# Altium PCB PCB1.PcbDoc
Units mm, origin at the board's own origin, x right, y up, seen from the top; angles counter-clockwise.
Board outline 70.61 x 37.34 mm, 2 copper layers (Top Layer, Bottom Layer); 30 components, 21 nets, 108 pads, 7 vias.
Unrouted connection lines stored in the file: 6.
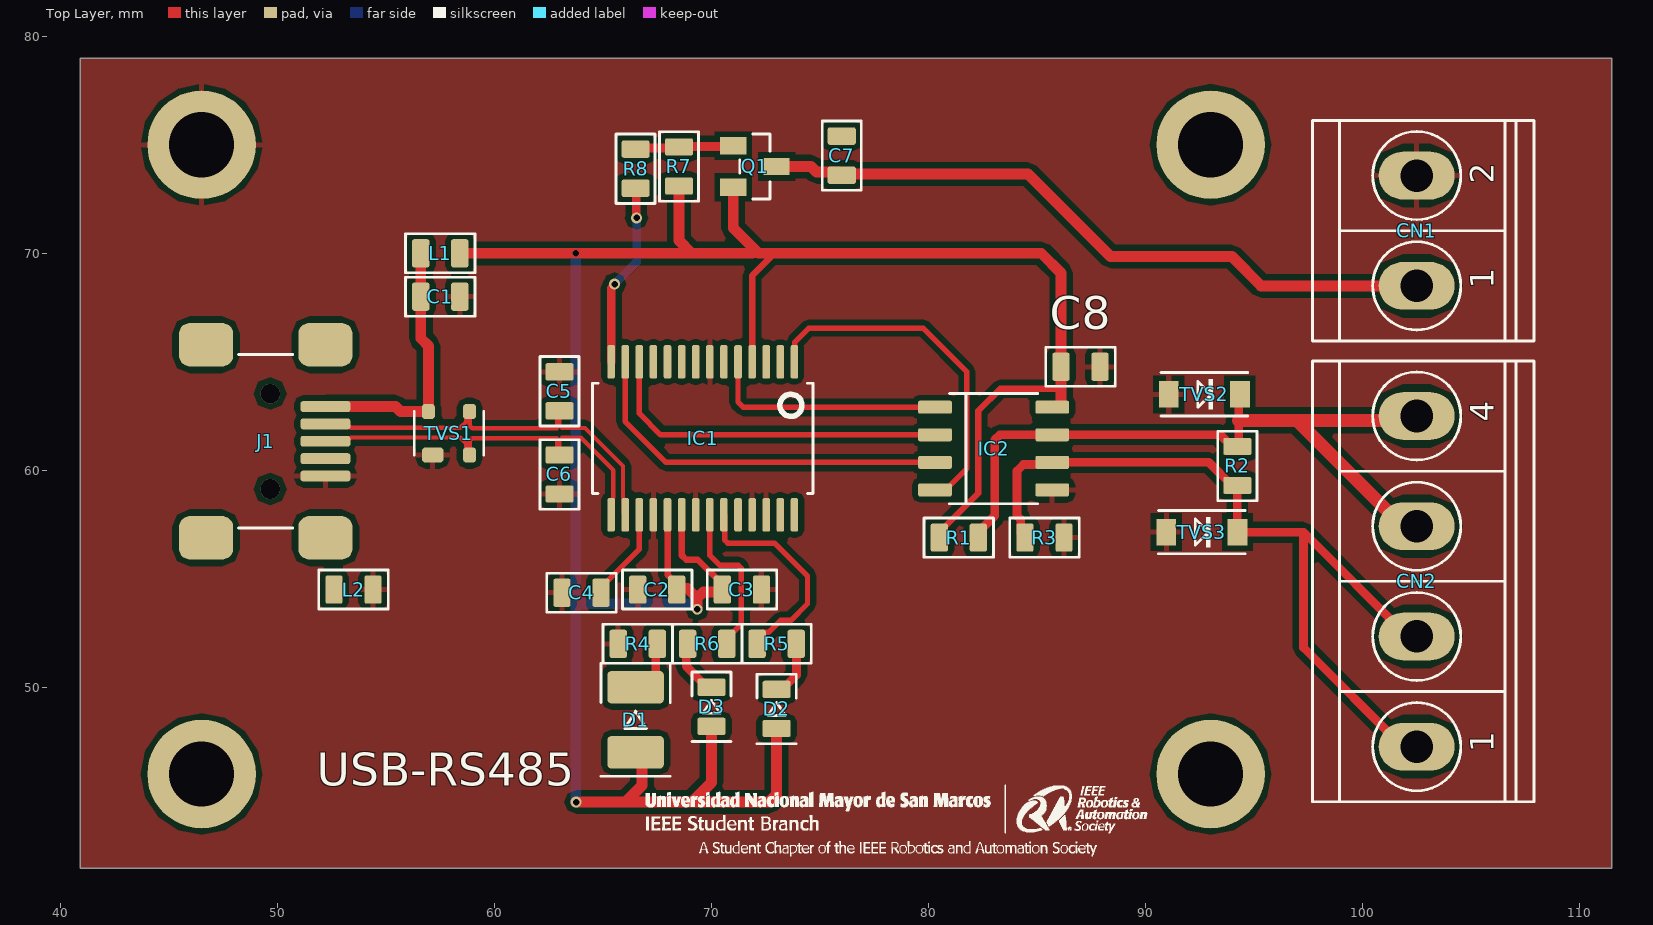
[diagram p0: Top Layer view]
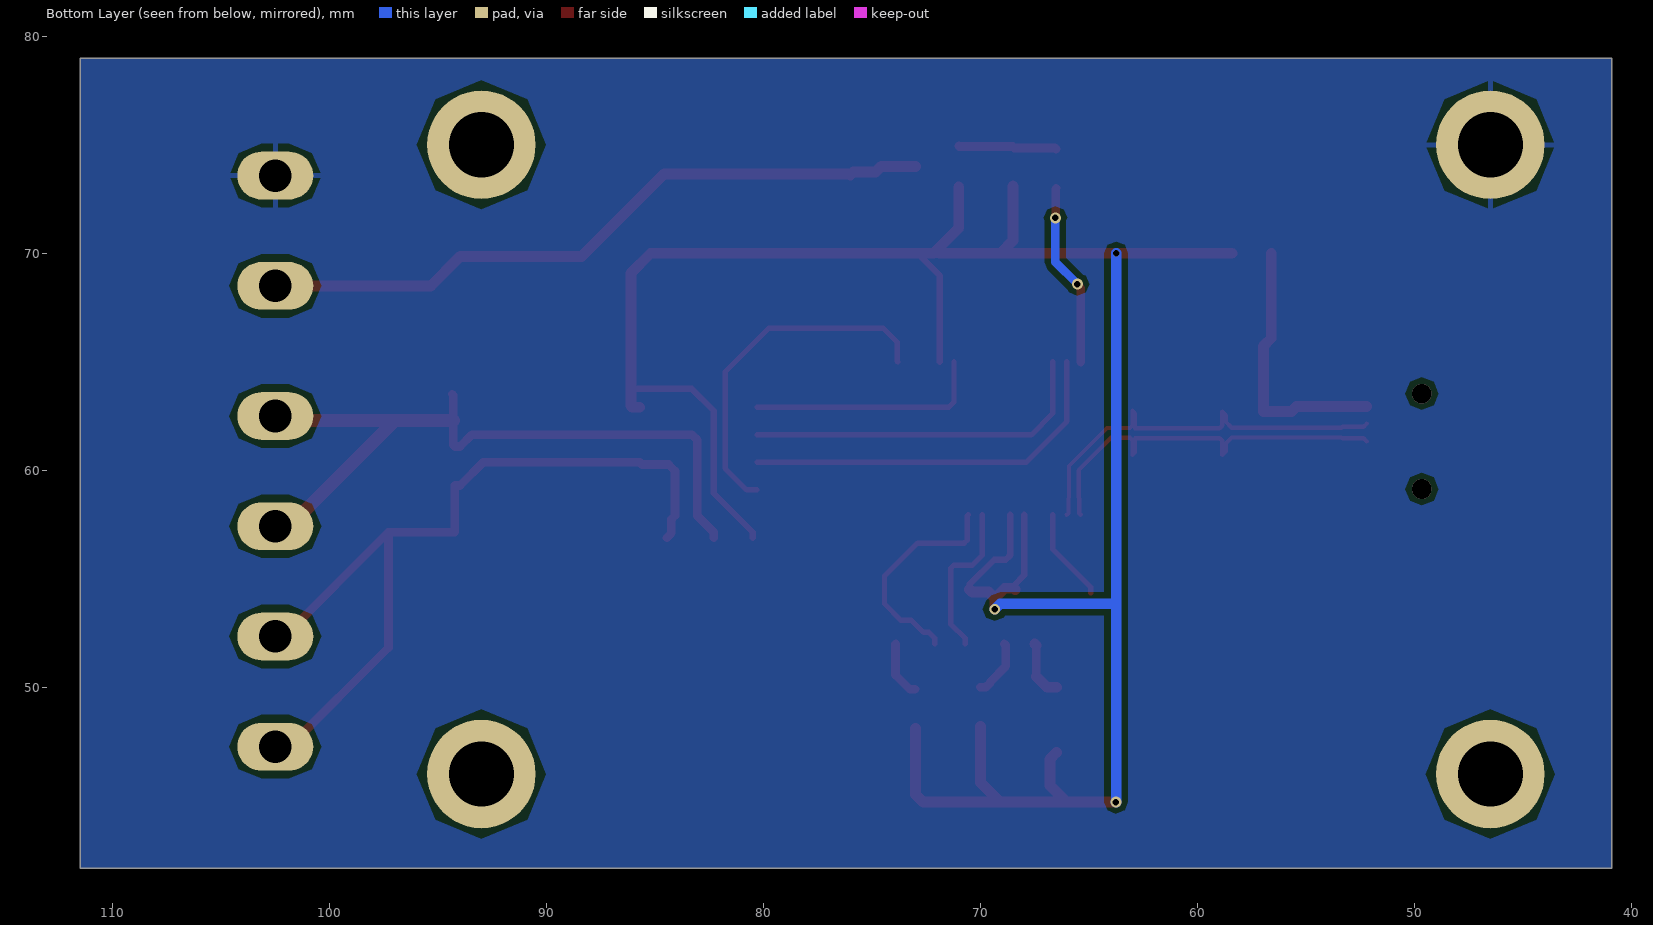
[diagram p1: Bottom Layer view, seen from below]
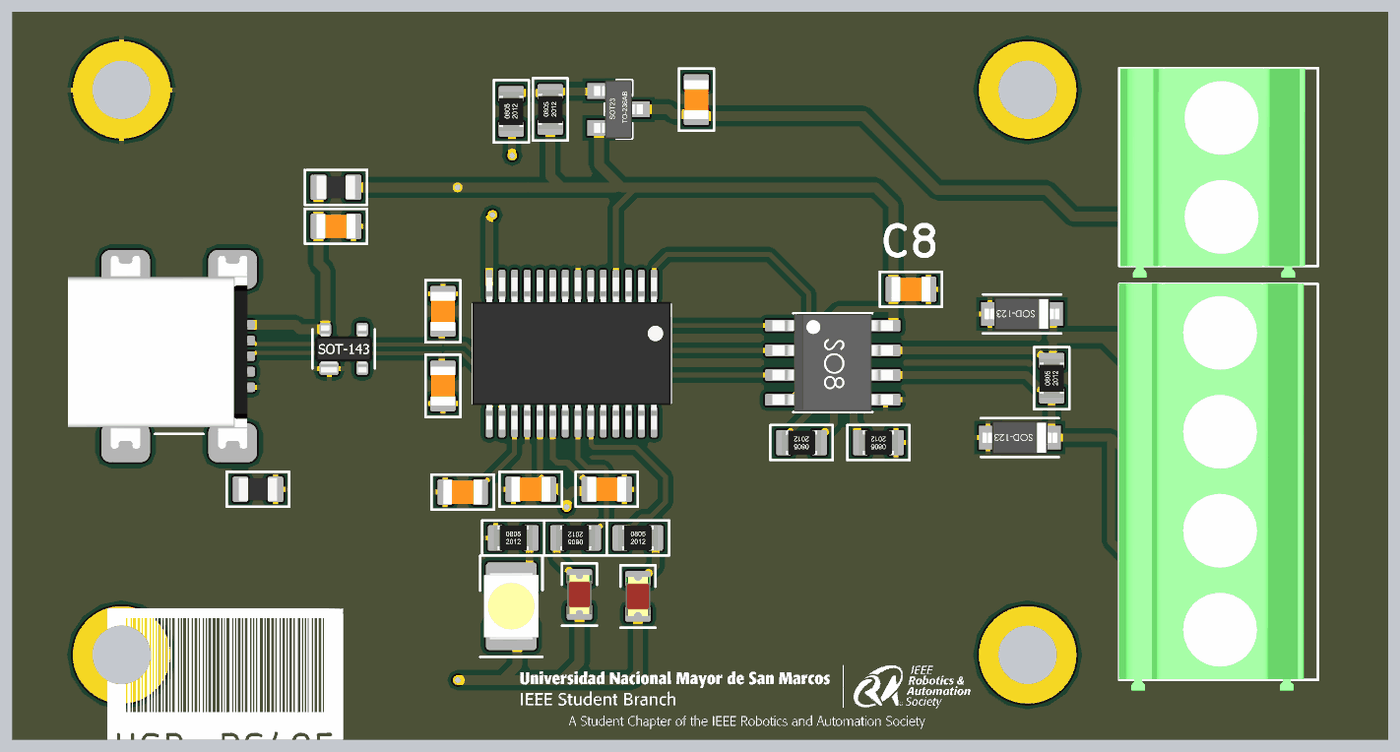
[diagram p2: 3D render of the assembled board from above, using the file's embedded part models]

## Layer stack, top to bottom
Top Solder: solder mask 0.0102, Solder Resist, Dk 3.5
Top Layer: signal copper 0.0356
Dielectric 1: dielectric 0.32, FR-4, Dk 4.8
Bottom Layer: signal copper 0.0356
Bottom Solder: solder mask 0.0102, Solder Resist, Dk 3.5

## Board outline
40.894,41.656 40.894,79 111.5,79 111.5,41.656

## Design rules (kind name [scope] priority, off if disabled: settings)
Clearance [All] p1: gap=0.25 ignorepadtopadclearanceinfootprint=FALSE except(0: Arc-Hole Track-Hole SMDPad-Hole THPad-Hole Via-Hole Fill-Hole Poly-Hole Region-Hole Text-Hole; 0.254: Arc-Text Track-Text SMDPad-Text THPad-Text Via-Text Fill-Text Poly-Text Region-Text Text-Text)
DiffPairsRouting [All] p1: maxlimit=0.254 minlimit=0.25 mostfreqgap=0.254 toplayer_minwidth=0.2 toplayer_maxwidth=0.4 toplayer_prefwidth=0.35 bottomlayer_minwidth=0.2 bottomlayer_maxwidth=0.4 bottomlayer_prefwidth=0.35 maxuncoupledlength=12.7
PlaneClearance [All] p1: clearance=0.7
PlaneConnect [All] p1: planeconnectstyle=Relief reliefexpansion=0.6 reliefentries=4 reliefconductorwidth=0.3 reliefairgap=0.254
PolygonConnect [All] p1: connectstyle=Relief reliefconductorwidth=0.254 reliefentries=4 polygonreliefangle="90 Angle" airgapwidth=0.254
RoutingVias [All] p1: holewidth=0.3 width=0.5 viastyle="Through Hole" minholewidth=0.3 minwidth=0.5 maxholewidth=0.3 maxwidth=0.5
SolderMaskExpansion [All] p1: expansion=0.102 istentingtop=FALSE
Width Digital [All] p1: maxlimit=0.6 minlimit=0.25 preferedwidth=0.4
Width Power [All] p2 off: maxlimit=1.5 minlimit=0.3 preferedwidth=0.5
27 further rules are at their usual default settings.

## Classes and differential pairs
differential pair USB: +USB_P -USB_N

## Components (designator, comment, footprint, x,y, rotation, side; value= is the part's Value field where it differs from the comment)
C1 "100nF" C0805 57.5,68 r180 top
C2 "100nF" C0805 67.5,54.5 r0 top
C3 "4.7uF" C0805 71.4,54.5 r0 top value=100nF
C4 "100nF" C0805 64.008,54.356 r0 top
C5 "47pF" C0805 62.992,63.638 r270 top value=100nF
C6 "47pF" C0805 62.992,59.806 r90 top value=100nF
C7 "100nF" C0805 76,74.5 r270 top
C8 "100nF" C0805 87.006,64.77 r180 top
CN1 "TB508-02" TB508-02 102.5,71.04 r90 top
CN2 "TB-04" TB508-04 102.5,54.88 r90 top
D1 "LED" LED-1210 66.5,48.5 r270 top
D2 "LED" LED-0805 73,49 r270 top
D3 "LED" LED-0805 70,49.1 r270 top
IC1 "FT232RL" SSOP-28 69.596,61.468 r270 top
IC2 "MAX485" SOIC8-N 83,61 r0 top
J1 "690-005-299-043" USB-Mini 52.204,61.336 r270 top
L1 "10uH" L0805 57.5,70 r0 top
L2 "10uH" L0805 53.5,54.5 r180 top
Q1 "IRLML6402TRPBF" SOT23-3 72,74 r270 top
R1 "4K0" R0805 81.396,56.896 r180 top value=1k0
R2 "120" R0805 94.234,60.198 r90 top value=1k0
R3 "4K0" R0805 85.344,56.896 r180 top value=1k0
R4 "1k0" R0805 66.6,52 r0 top
R5 "1k0" R0805 73,52 r0 top
R6 "1k0" R0805 69.8,52 r180 top
R7 "100k0" R0805 68.5,74 r90 top value=1k0
R8 "10k0" R0805 66.5,73.9 r90 top value=1k0
TVS1 "PRTR5V0U2X,215" SOT143-4 57.9,61.706 r0 top
TVS2 "SMDJ15A" SOD123 92.71,63.5 r180 top
TVS3 "SMDJ15A" SOD123 92.596,57.15 r180 top

## Footprints (in the part's own frame and the unit in brackets; to place one, negate y for a bottom-side part, rotate by r counter-clockwise, add the part's x,y. Pads: shape width x height; smd on the part's side, far side on the other; paste and mask are expansions set on the pad)
C0805 [mm] "Ceramic capacitor 0805"
  rrect25% 0.8x1.3 smd: 1(-0.9,0) 2(0.9,0)
  silkscreen extent -1.6,-0.9 1.6,0.9, body extent -1,-0.62 1,0.63, height 0.8
L0805 [mm] "SMT INDUCTOR 0805"
  rrect25% 0.8x1.3 smd: 1(-0.9,0) 2(0.9,0)
  silkscreen extent -1.6,-0.9 1.6,0.9, body extent -1,-0.6 1,0.6, height 0.95
LED-0805 [mm] "SMT LED DIODE 0805"
  rrect25% 0.8x1.3 smd: 1(-0.9,0) 2(0.9,0)
  silkscreen extent -1.6,-0.9 1.6,0.9, body extent -1.01,-0.62 1.01,0.63, height 1.1
LED-1210 [mm] "SMT LED DIODE 1210"
  rrect25% 1.5x2.6 smd: 1(-1.5,0) 2(1.5,0)
  silkscreen extent -2.6,-1.6 2.6,1.6, body extent -1.75,-1.4 1.75,1.4, height 1.86
R0805 [mm] "SMD RESISTOR 0805"
  rrect25% 0.8x1.3 smd: 1(-0.9,0) 2(0.9,0)
  silkscreen extent -1.6,-0.9 1.6,0.9, body extent -1,-0.62 1,0.63, height 0.45
SOD123 [mil] "SOD123"
  rect 36x48 smd: 1(-64.5,0) 2(64.5,0)
  silkscreen extent -79,-39 79,39, body extent -76,-33 76,33, height 57
SOIC8-N [mm] "SOIC8 - SO08 - SMALL OUTLINE INTEGRATED CIRCUIT"
  rrect25% 1.55x0.6 smd: 1(-2.7,1.905) 2(-2.7,0.635) 3(-2.7,-0.635) 4(-2.7,-1.905) 5(2.7,-1.905) 6(2.7,-0.635) 7(2.7,0.635) 8(2.7,1.905)
  silkscreen extent -2.03,-2.54 2.03,2.54, body extent -3.1,-2.5 3.1,2.5, height 1.75
SOT23-3 [mm] "SOT23-3 Package"
  rect 0.8x1.2 smd: 1(-0.95,-1) 2(0.95,-1) 3(0,1)
  silkscreen extent -1.5,-0.7 1.5,0.7, body extent -1.5,-1.25 1.5,1.25, height 1.09
SOT143-4 [mm] "SOT143-4 Package, TO-253-4, TO-253AA Case"
  rrect50% 1x0.7 smd: 1(-0.75,-1)
  rrect50% 0.6x0.7 smd: 2(0.95,-1) 3(0.95,1) 4(-0.95,1)
  silkscreen extent -1.6,-1 1.6,1, body extent -1.46,-1.21 1.46,1.21, height 1
SSOP-28 [mm] "SSOP-28  / SSOP28"
  rrect50% 1.55x0.35 smd: 1(-3.525,4.225) 2(-3.525,3.575) 3(-3.525,2.925) 4(-3.525,2.275) 5(-3.525,1.625) 6(-3.525,0.975) 7(-3.525,0.325) 8(-3.525,-0.325) 9(-3.525,-0.975) 10(-3.525,-1.625) 11(-3.525,-2.275) 12(-3.525,-2.925) 13(-3.525,-3.575) 14(-3.525,-4.225) 15(3.525,-4.225) 16(3.525,-3.575) 17(3.525,-2.925) 18(3.525,-2.275) 19(3.525,-1.625) 20(3.525,-0.975) 21(3.525,-0.325) 22(3.525,0.325) 23(3.525,0.975) 24(3.525,1.625) 25(3.525,2.275) 26(3.525,2.925) 27(3.525,3.575) 28(3.525,4.225)
  silkscreen extent -2.54,-5.08 2.54,5.08, body extent -3.9,-5.1 3.9,5.1, height 1.9
TB508-02 [mm] "Vertical terminal block 0.2 inch (5.08mm) pitch"
  oval 2.2x3.5 hole 1.5: 1(-2.54,0) 2(2.54,0)
  silkscreen extent -5.08,-5.4 5.08,4.8, body extent -5.67,-4.75 5.06,4.75, height 15
TB508-04 [mm] "Vertical terminal block 0.2 inch (5.08mm) pitch"
  oval 2.2x3.5 hole 1.5: 1(-7.62,0) 2(-2.54,0) 3(2.54,0) 4(7.62,0)
  silkscreen extent -10.16,-5.4 10.16,4.8, body extent -10.7,-4.67 10.19,4.83, height 15.03
USB-Mini [mm] "CONN RCPT USB2.0 MINI B SMD R/A"
  rrect50% 0.5x2.3 smd: 1(-1.6,0) 2(-0.8,0) 3(0,0) 4(0.8,0) 5(1.6,0)
  rrect50% 2x2.5 smd: SHD(-4.45,0) SHD(-4.45,-5.5) SHD(4.45,0) SHD(4.45,-5.5)
  silkscreen extent -4,-4 4,-1.5, body extent -5.15,-8.45 4.75,0.8, height 3.93

## Part data
C1 C2 C3 C4 C5 C6 C7 C8: library part Capacitor, "Capacitor without polarity", Voltage=25V
CN1: library part TB-02, "Terminal Block"
CN2: "Terminal Block"
D1 D2 D3: "LED - Light-Emitting Diode"
IC1: library part FT232, "USB Bridge, USB to UART USB 2.0 UART Interface 28-SSOP"
IC2: "IC TRANSCEIVER HALF 1/1 8SOIC"
J1: library part USB-Mini-B, "CONN RCPT USB2.0 MINI B SMD R/A"
L1 L2: library part Inductor, "Inductor for low power", Max. current=0.5A, Core type=Ferrite, Unit price=0.1
Q1: library part MOSFET-P-LP, "P-Channel 20V 3.7A (Ta) 1.3W (Ta) /SOT-23 - LowPower"
R1 R2 R3 R4 R5 R6 R7 R8: library part Resistor, "Single resistor", Power=0.125W, Unit price=0.1
TVS1: library part TVS-DUAL-SOT143B, "Clamp  Ipp Tvs Diode Surface Mount SOT-143B"
TVS2 TVS3: library part TVS-SINGLE, "TVS DIODE - Transient Voltage Suppression Diode"

## Free pads (board coordinates)
  round 5 hole 3: 3(46.5,46) 3(46.5,75) 3(93,46) 3(93,75)

## Via types
v1: diameter 0.5, hole 0.3, Top Layer to Bottom Layer, 4 vias
v2: diameter 0.9, hole 0.9, Top Layer to Bottom Layer, 2 vias
v3: diameter 0.3, hole 0.3, Top Layer to Bottom Layer, 1 vias

## Nets (pads, with @x,y where several pads share a name; then routed paths per layer and width w, separated by ;. In a path a pad name is that pad's centre, name@x,y a point inside that pad or via, vN(x,y) a via of type N, cw(c..) or ccw(c..) an arc to the next point about the centre after c; other vN are vias at no path point)
+5AUX: C7.2 CN1.1 Q1.3 | length 31.8
  Top Layer w0.5: Q1.3 74.59,74 74.84,73.75 75.85,73.75 C7.2 76.06,73.66 84.582,73.66 88.392,69.85 93.98,69.85 95.33,68.5 CN1.1
+5V0: C2.2 C3.1 C8.2 D1.2 D2.2 D3.2 IC1.4 IC1.19 IC1.20 IC2.8 L1.2 Q1.2 R1.2 R7.1 | length 118.7
  Top Layer w0.3: IC1.19 67.971,55.179 68.4,54.75 C2.2 ; IC1.20 68.621,56.093 68.834,55.88 69.37,55.88 70.5,54.75 C3.1 ; IC1.4 71.871,68.973 72.898,70 ; R1.2 80.496,57.146 82.296,58.946 82.296,62.738 83.312,63.754 85.997,63.754 86.106,63.863
  Top Layer w0.5: L1.2 v3(63.744,70) 69.088,70 ; v1(63.754,44.704) 66.04,44.704 ; D1.2 66.802,46.698 66.802,45.466 66.04,44.704 ; C2.2 68.465,54.565 68.879,54.565 69.342,54.102 ; R7.1 68.5,70.588 69.088,70 ; v1(69.342,53.594) 69.342,54.102 ; D3.2 70,45.616 69.088,44.704 ; C3.1 70.395,54.395 69.635,54.395 69.342,54.102 ; Q1.2 71,71.165 72.165,70 72.898,70 85.194,70 86.106,69.088 C8.2 86.106,63.863 86.106,62.955 86.056,62.905 IC2.8 ; 71.882,70 69.088,70 ; D2.2 73,45.06 72.644,44.704 69.088,44.704 ; 66.04,44.704 69.088,44.704
  Bottom Layer w0.5: v3(63.744,70) 63.744,53.848 ; v1(63.754,44.704) 63.744,44.714 63.744,53.848 ; v1(69.342,53.594) 69.088,53.848 63.744,53.848
GND: C1.1 C2.1 C3.2 C4.1 C5.1 C6.1 C8.1 CN1.2 IC1.7 IC1.18 IC1.21 IC1.25 IC1.26 IC2.5 J1.5 L2.1 pad.3@46.5,75 R3.1 R4.1 TVS1.1 TVS2.2 TVS3.2
NetC1_2: C1.2 J1.1 L1.1 TVS1.4 | length 12.3
  Top Layer w0.5: J1.1 55.428,62.936 55.658,62.706 TVS1.4 56.95,65.732 56.6,66.082 L1.1
NetC4_2: C4.2 IC1.17 | length 4.3
  Top Layer w0.25: C4.2 64.908,54.606 66.671,56.369 IC1.17
NetC7_1: C7.1 Q1.1 R7.2 R8.2 | length 4.6
  Top Layer w0.4: R8.2 66.55,74.85 68.45,74.85 R7.2 68.525,74.925 70.975,74.925 Q1.1
NetCN2_1: CN2.1 CN2.2 IC2.6 R2.1 R3.2 TVS3.1 | length 38.8
  Top Layer w0.4: R3.2 84.244,57.096 84.244,57.742 84.074,57.912 84.074,59.964 84.375,60.265 85.6,60.265 IC2.6 92.917,60.365 93.984,59.298 R2.1 TVS3.1 97.282,57.15 ; CN2.1 101.85,47.26 97.282,51.828 97.282,57.15 ; CN2.2 102.092,52.34 97.282,57.15
NetCN2_3: CN2.3 CN2.4 IC2.7 R1.1 R2.2 TVS2.1 | length 34.6
  Top Layer w0.4: R1.1 82.296,57.146 83.058,57.908 83.058,61.401 83.292,61.635 IC2.7 93.447,61.635 93.984,61.098 R2.2 94.291,61.155 94.291,62.299 94.291,63.443 TVS2.1
  Top Layer w0.6: 94.291,62.299 96.971,62.299 ; CN2.3 101.85,57.42 96.971,62.299 ; CN2.4 102.299,62.299 96.971,62.299
NetD1_1: D1.1 R4.2 | length 2.7
  Top Layer w0.4: D1.1@67.431,50.5 R4.2@67.431,51.931
  Top Layer w0.5: D1.1 66.931,50 D1.1@67.431,50.5 ; R4.2@67.431,51.931 R4.2
NetD2_1: D2.1 R5.2 | length 2.6
  Top Layer w0.4: D2.1 73.25,49.9 73.914,50.564 73.914,51.986 R5.2
NetD3_1: D3.1 R6.2 | length 2.7
  Top Layer w0.4: R6.2 68.834,51.934 68.834,50.962 69.55,50.246 69.55,50.2 69.75,50 D3.1
NetIC1_12: IC1.12 IC2.2 | length 16.4
  Top Layer w0.25: IC1.12 66.671,62.615 67.651,61.635 IC2.2
NetIC1_13: IC1.13 IC2.3 | length 17.8
  Top Layer w0.25: IC1.13 66.021,62.249 67.905,60.365 IC2.3
NetIC1_14: IC1.14 R8.1 | length 8.5
  Top Layer w0.4: IC1.14 65.371,68.392 65.532,68.553 v1(65.532,68.58) ; R8.1 66.529,72.971 66.529,71.647 v1(66.548,71.628)
  Bottom Layer w0.4: v1(65.532,68.58) 66.548,69.596 v1(66.548,71.628)
NetIC1_22: IC1.22 R6.1 | length 7.3
  Top Layer w0.25: IC1.22 69.921,56.071 70.366,55.626 71.228,55.626 71.374,55.48 71.374,52.924 70.7,52.25 R6.1
NetIC1_23: IC1.23 R5.1 | length 10.2
  Top Layer w0.25: IC1.23 70.604,57.91 70.604,56.793 70.755,56.642 72.898,56.642 74.422,55.118 74.422,53.848 73.66,53.086 73.186,53.086 72.625,52.525 72.375,52.525 72.1,52.25 R5.1
NetJ1_SHD: J1.SHD L2.2
rx: IC1.5 IC2.1 | length 11
  Top Layer w0.25: IC1.5 71.221,63.145 71.461,62.905 IC2.1
tx: IC1.1 IC2.4 | length 16.3
  Top Layer w0.25: IC1.1 73.839,65.011 73.839,65.904 74.483,66.548 79.756,66.548 81.771,64.533 81.771,60.091 80.775,59.095 IC2.4
USB_N: C5.2 IC1.16 J1.2 TVS1.3 | length 19.5
  Top Layer w0.2: J1.2 52.339,62.001 53.333,62.001 53.371,61.963 58.42,61.963 58.681,62.224 58.681,62.537 TVS1.3 58.85,62.05 58.967,61.933 62.875,61.933 62.875,62.621 C5.2 62.992,62.066 63.109,61.949 64.169,61.949 65.923,60.195 65.923,58.735 65.946,58.712 65.946,58.018 IC1.16
USB_P: C6.2 IC1.15 J1.3 TVS1.2 | length 18.7
  Top Layer w0.2: J1.3 52.339,61.471 53.333,61.471 53.371,61.509 58.42,61.509 58.681,61.248 58.681,60.875 TVS1.2 58.85,61.362 58.967,61.479 62.875,61.479 62.875,60.823 C6.2 62.992,61.378 63.109,61.495 63.981,61.495 65.469,60.007 65.469,58.735 65.446,58.712 65.446,58.018 IC1.15
pads on no net: IC1.2 IC1.3 IC1.6 IC1.8 IC1.9 IC1.10 IC1.11 IC1.24 IC1.27 IC1.28 J1.4
copper on no net:
  other v2: 49.654,59.136 49.654,63.536

## Polygon pours and split planes (outlines as drawn)
GND on Top Layer "GND_L01_P000" (solid, pour order 0): 40.894,41.656 40.894,79 111.5,79 111.5,41.656
GND on Bottom Layer "GND_L02_P001" (solid, pour order 1): 40.894,41.656 40.894,79 111.5,79 111.5,41.656

## Silkscreen, mask and mechanical layers (free items; w line width, h text height)
Top Overlay:
  drawing of 156 lines, arcs and shapes, not listed
  text "USB-RS485" at 51.816,45.466 h1.52
Mechanical 1:
  the board outline again, w1.2

## Text inside footprints (layer, text, board x,y; h text height)
CN1: Top Overlay "1" at 106.056,68.373 h1.1 r90; Top Overlay "2" at 106.056,73.199 h1.1 r90
CN2: Top Overlay "1" at 106.056,47.006 h1.1 r90; Top Overlay "4" at 106.056,62.246 h1.1 r90